# Altium PCB StepTMC5160.PcbDoc (part 1 of 3)
Units mm, origin at the board's own origin, x right, y up, seen from the top; angles counter-clockwise.
Board outline 109.42 x 88.01 mm, 4 copper layers (Component Side, GND, VCC, Bottom Layer), stack 0.778 mm thick; 190 components, 123 nets, 661 pads, 738 vias.
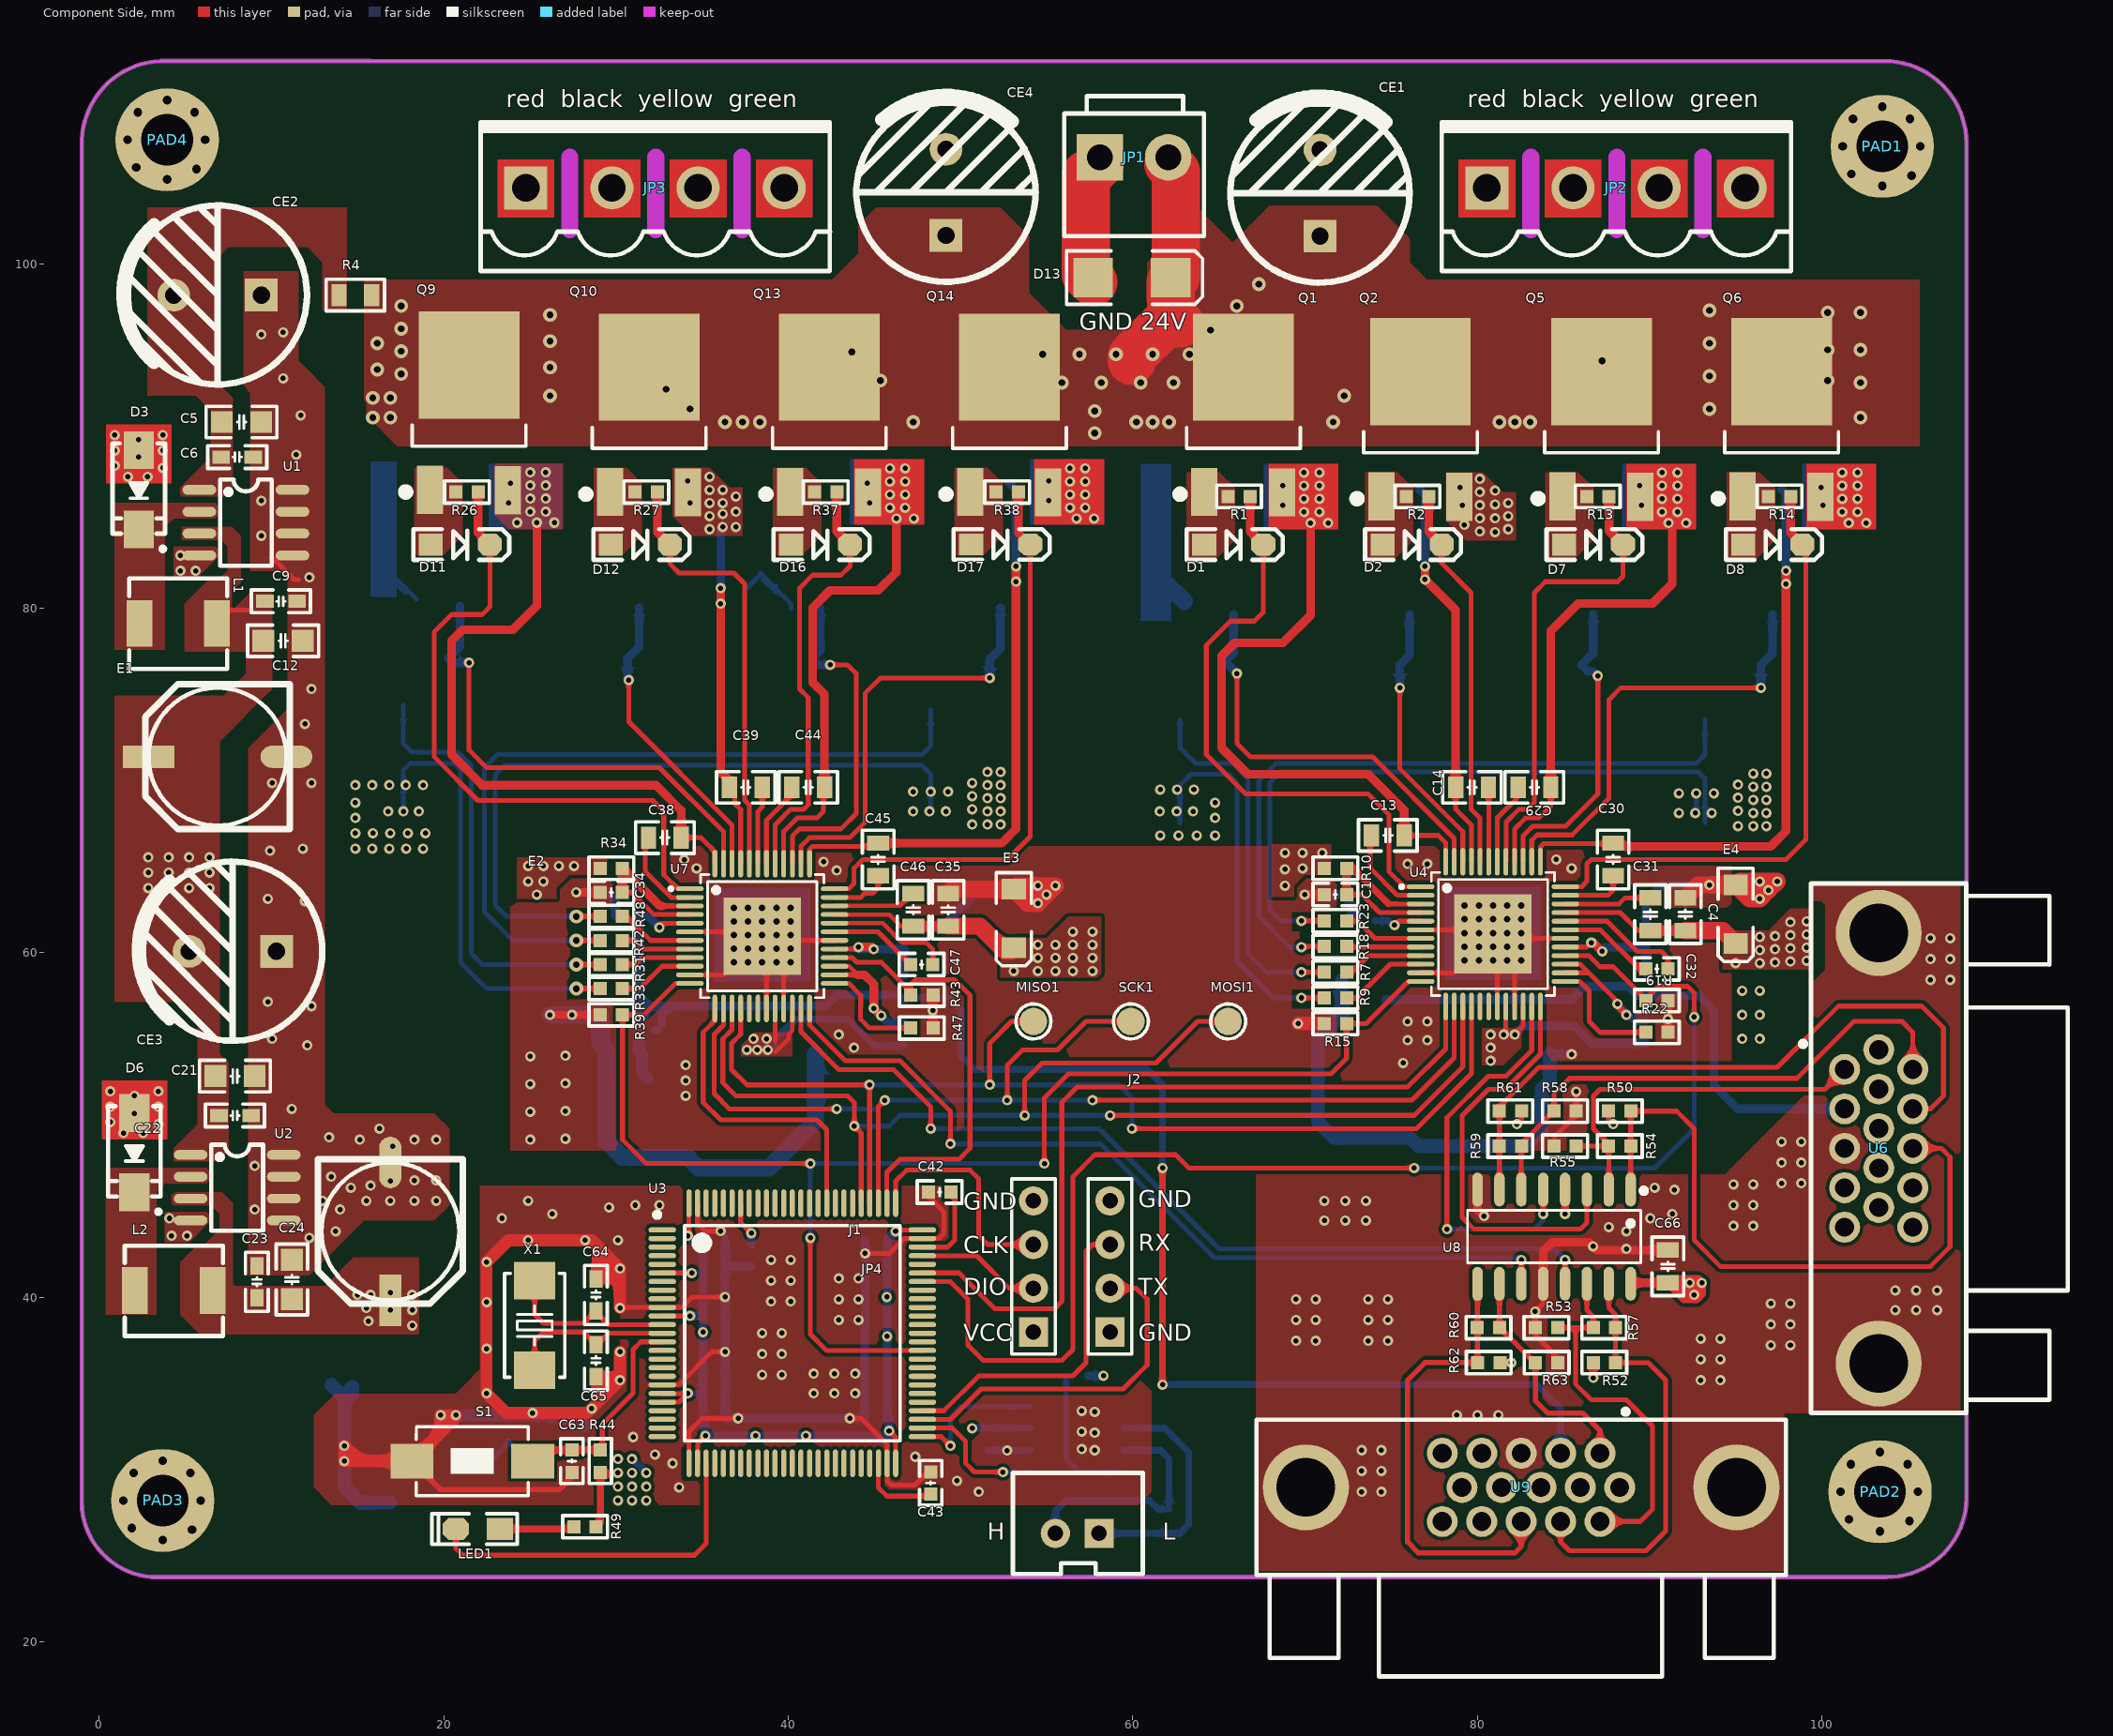
[diagram p0: Component Side view]
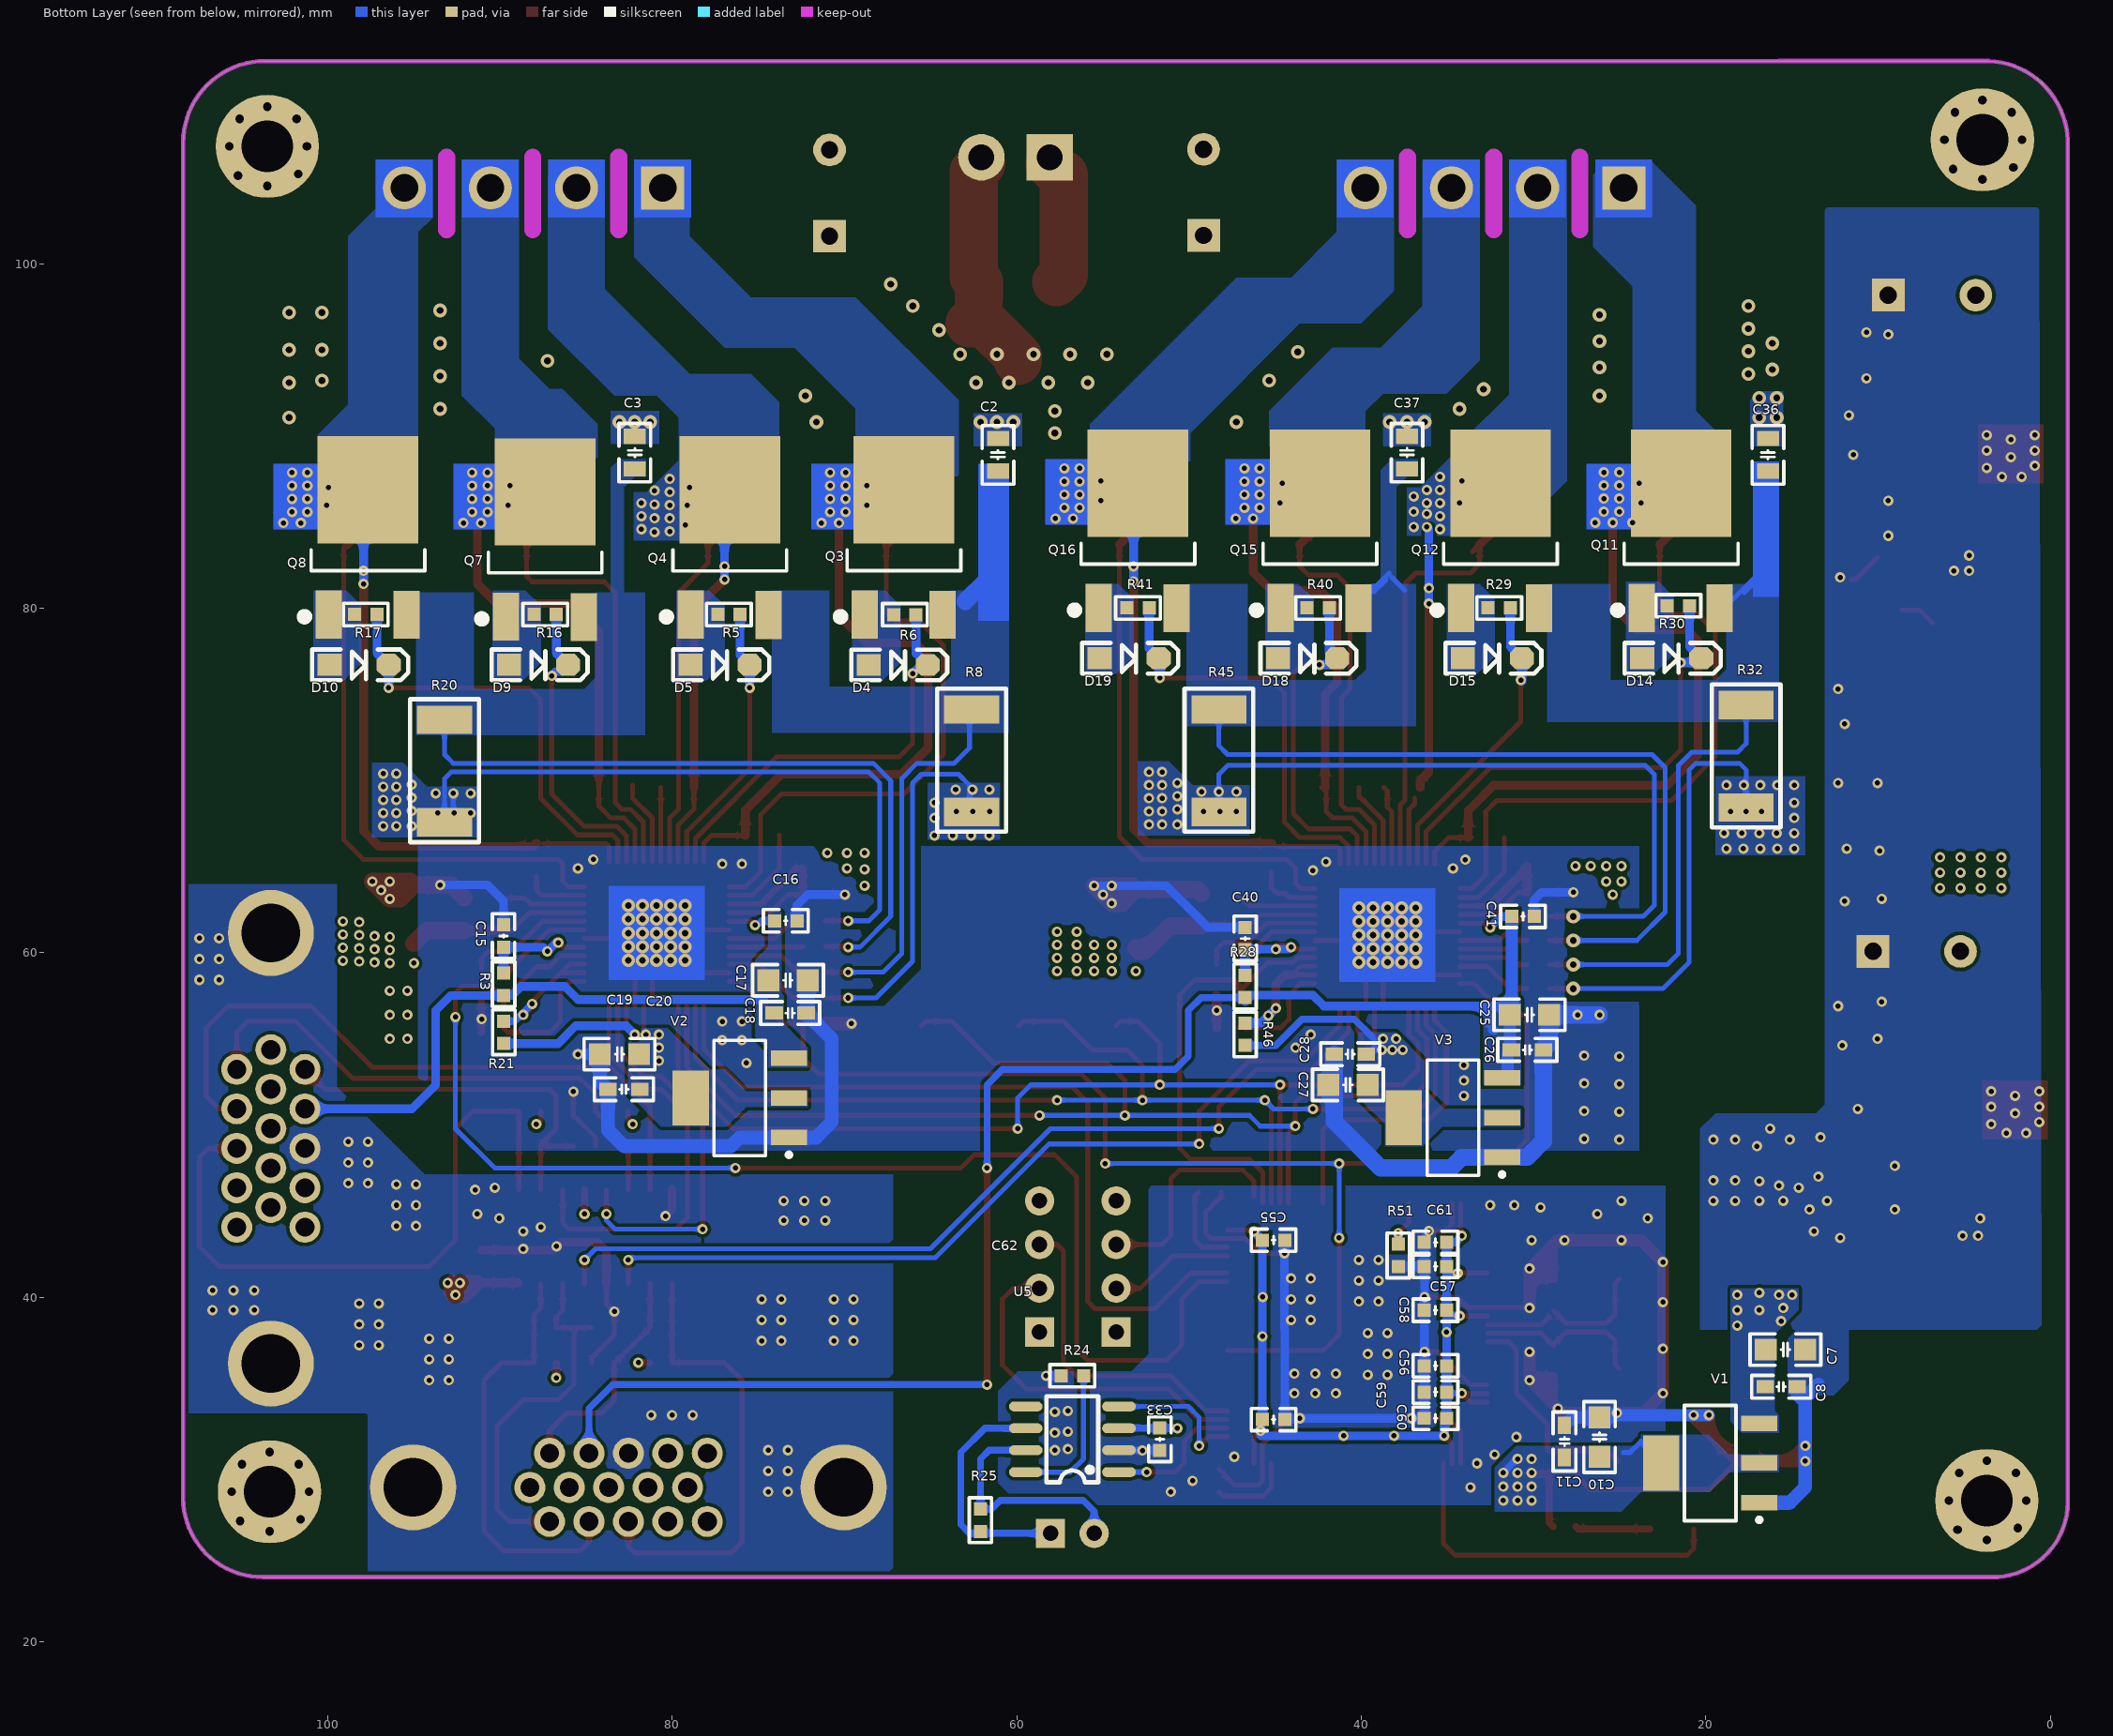
[diagram p1: Bottom Layer view, seen from below]
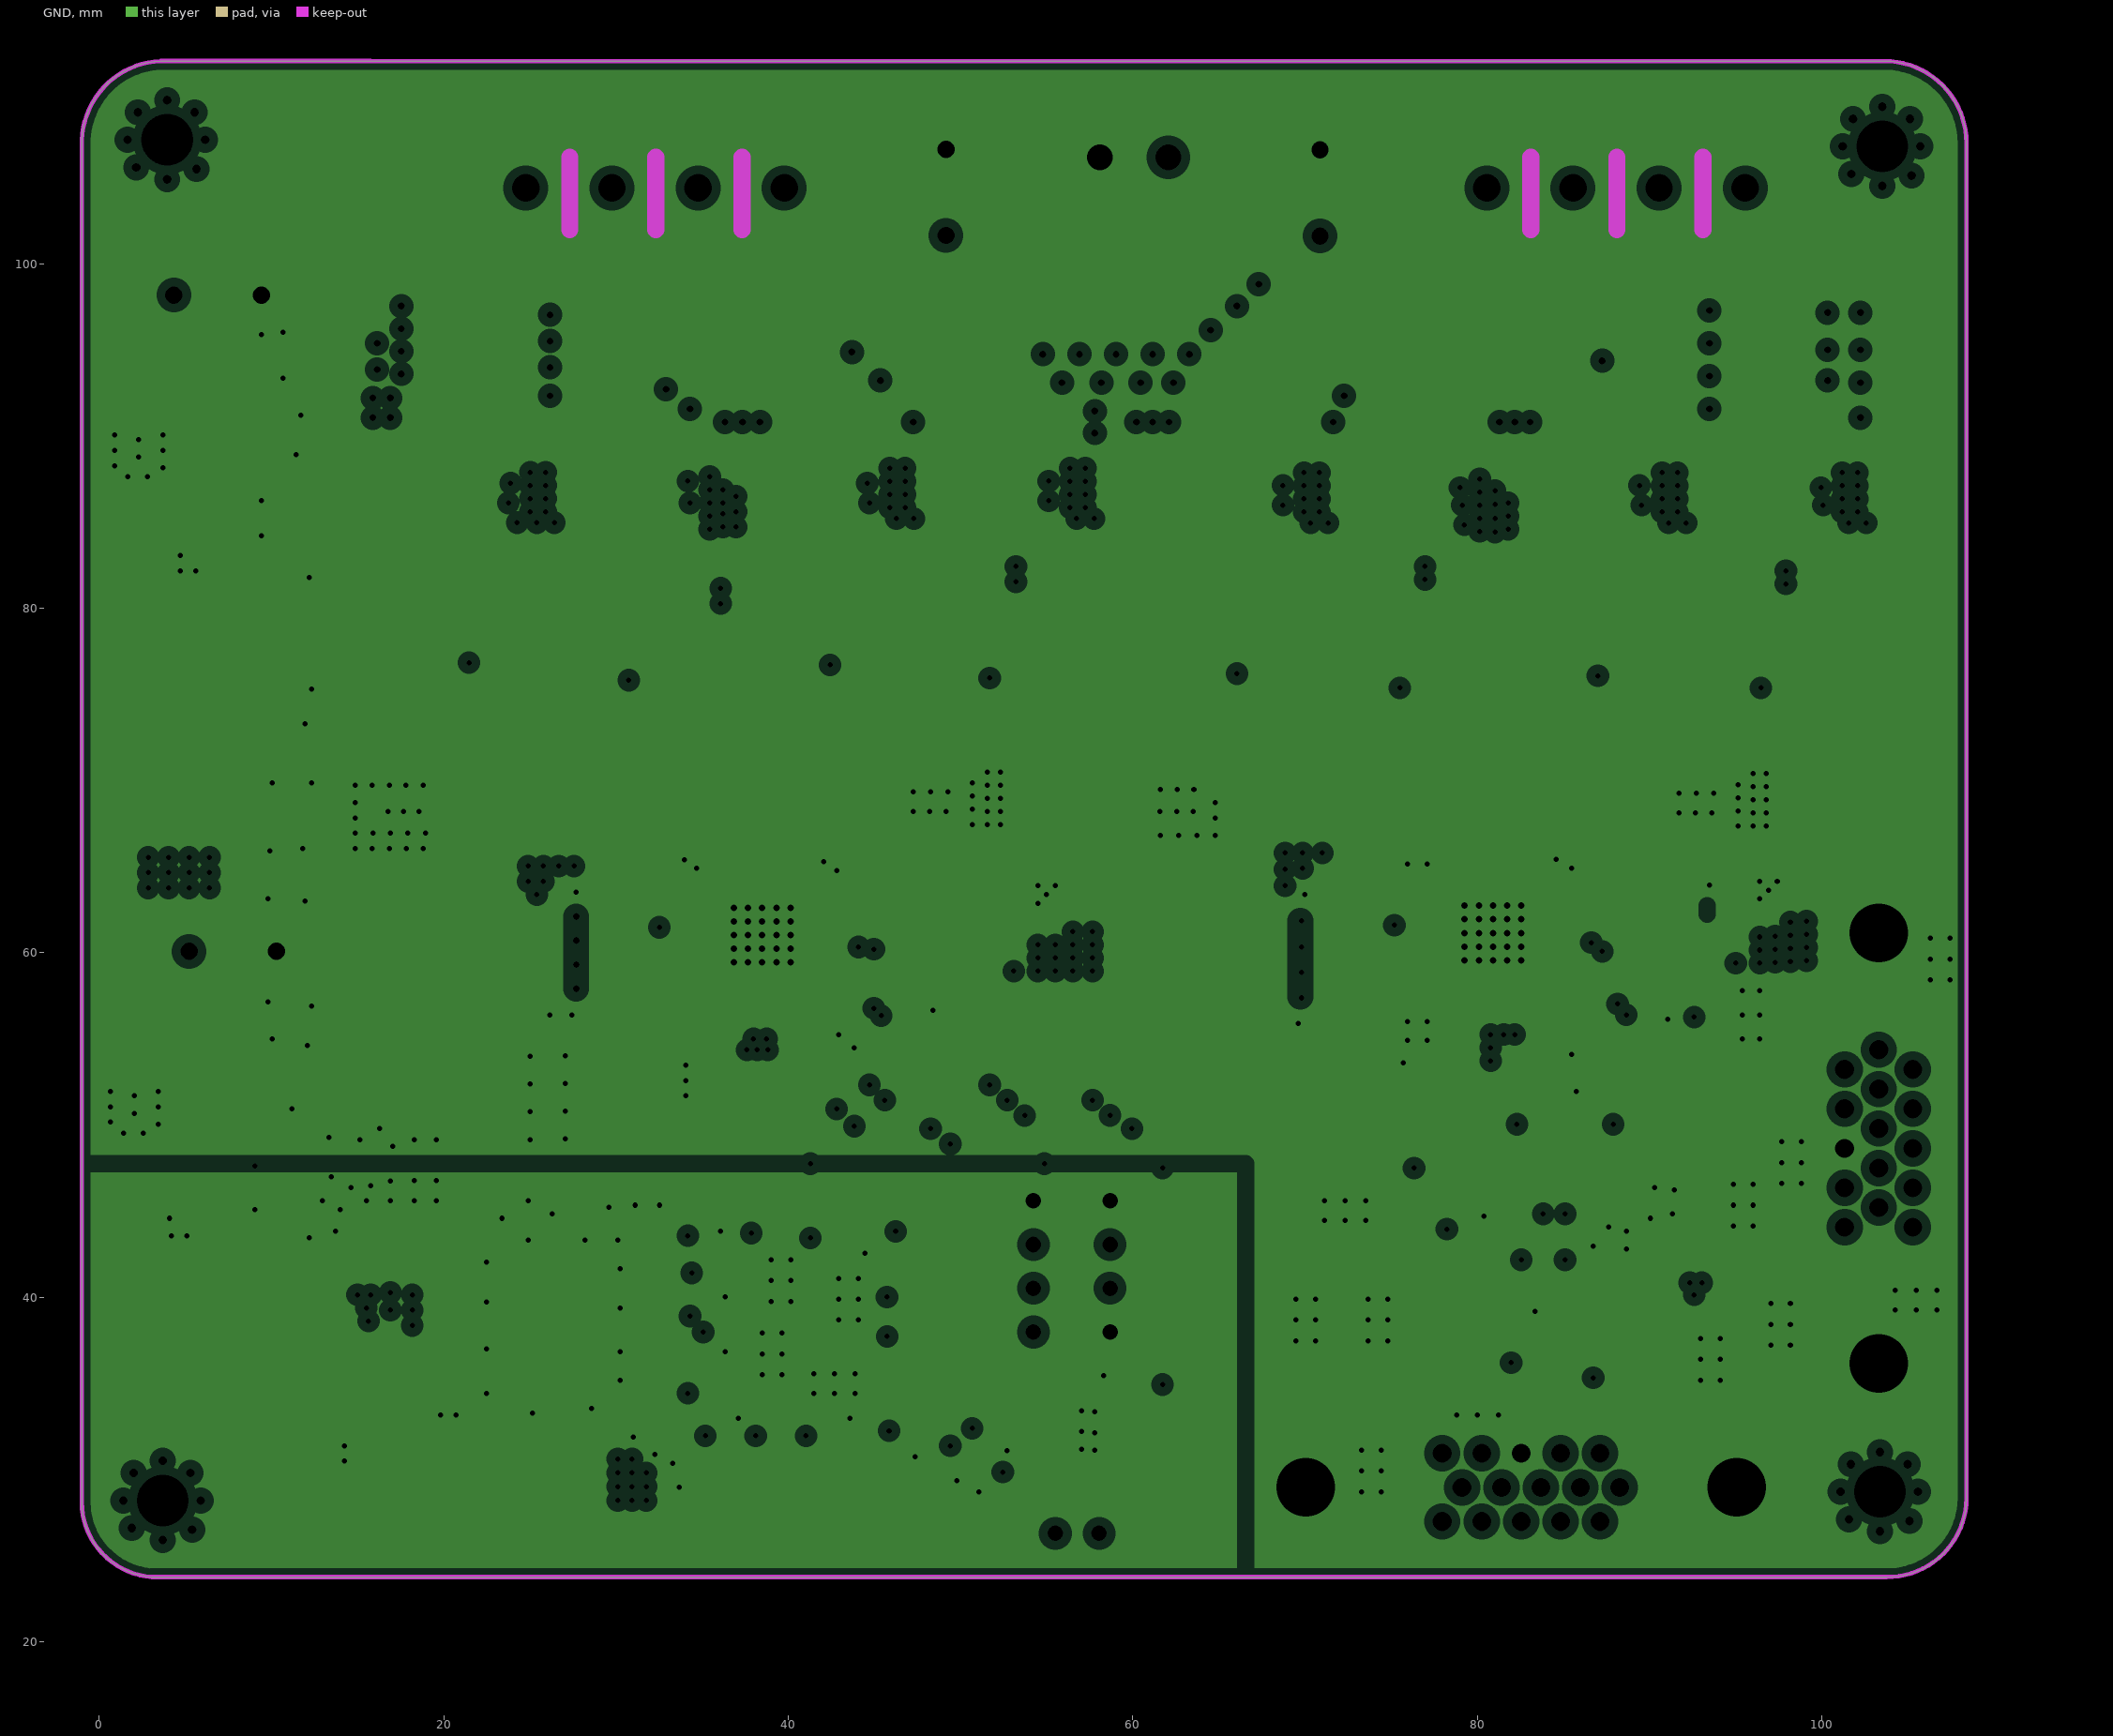
[diagram p2: GND, clearances drawn from the general rule]
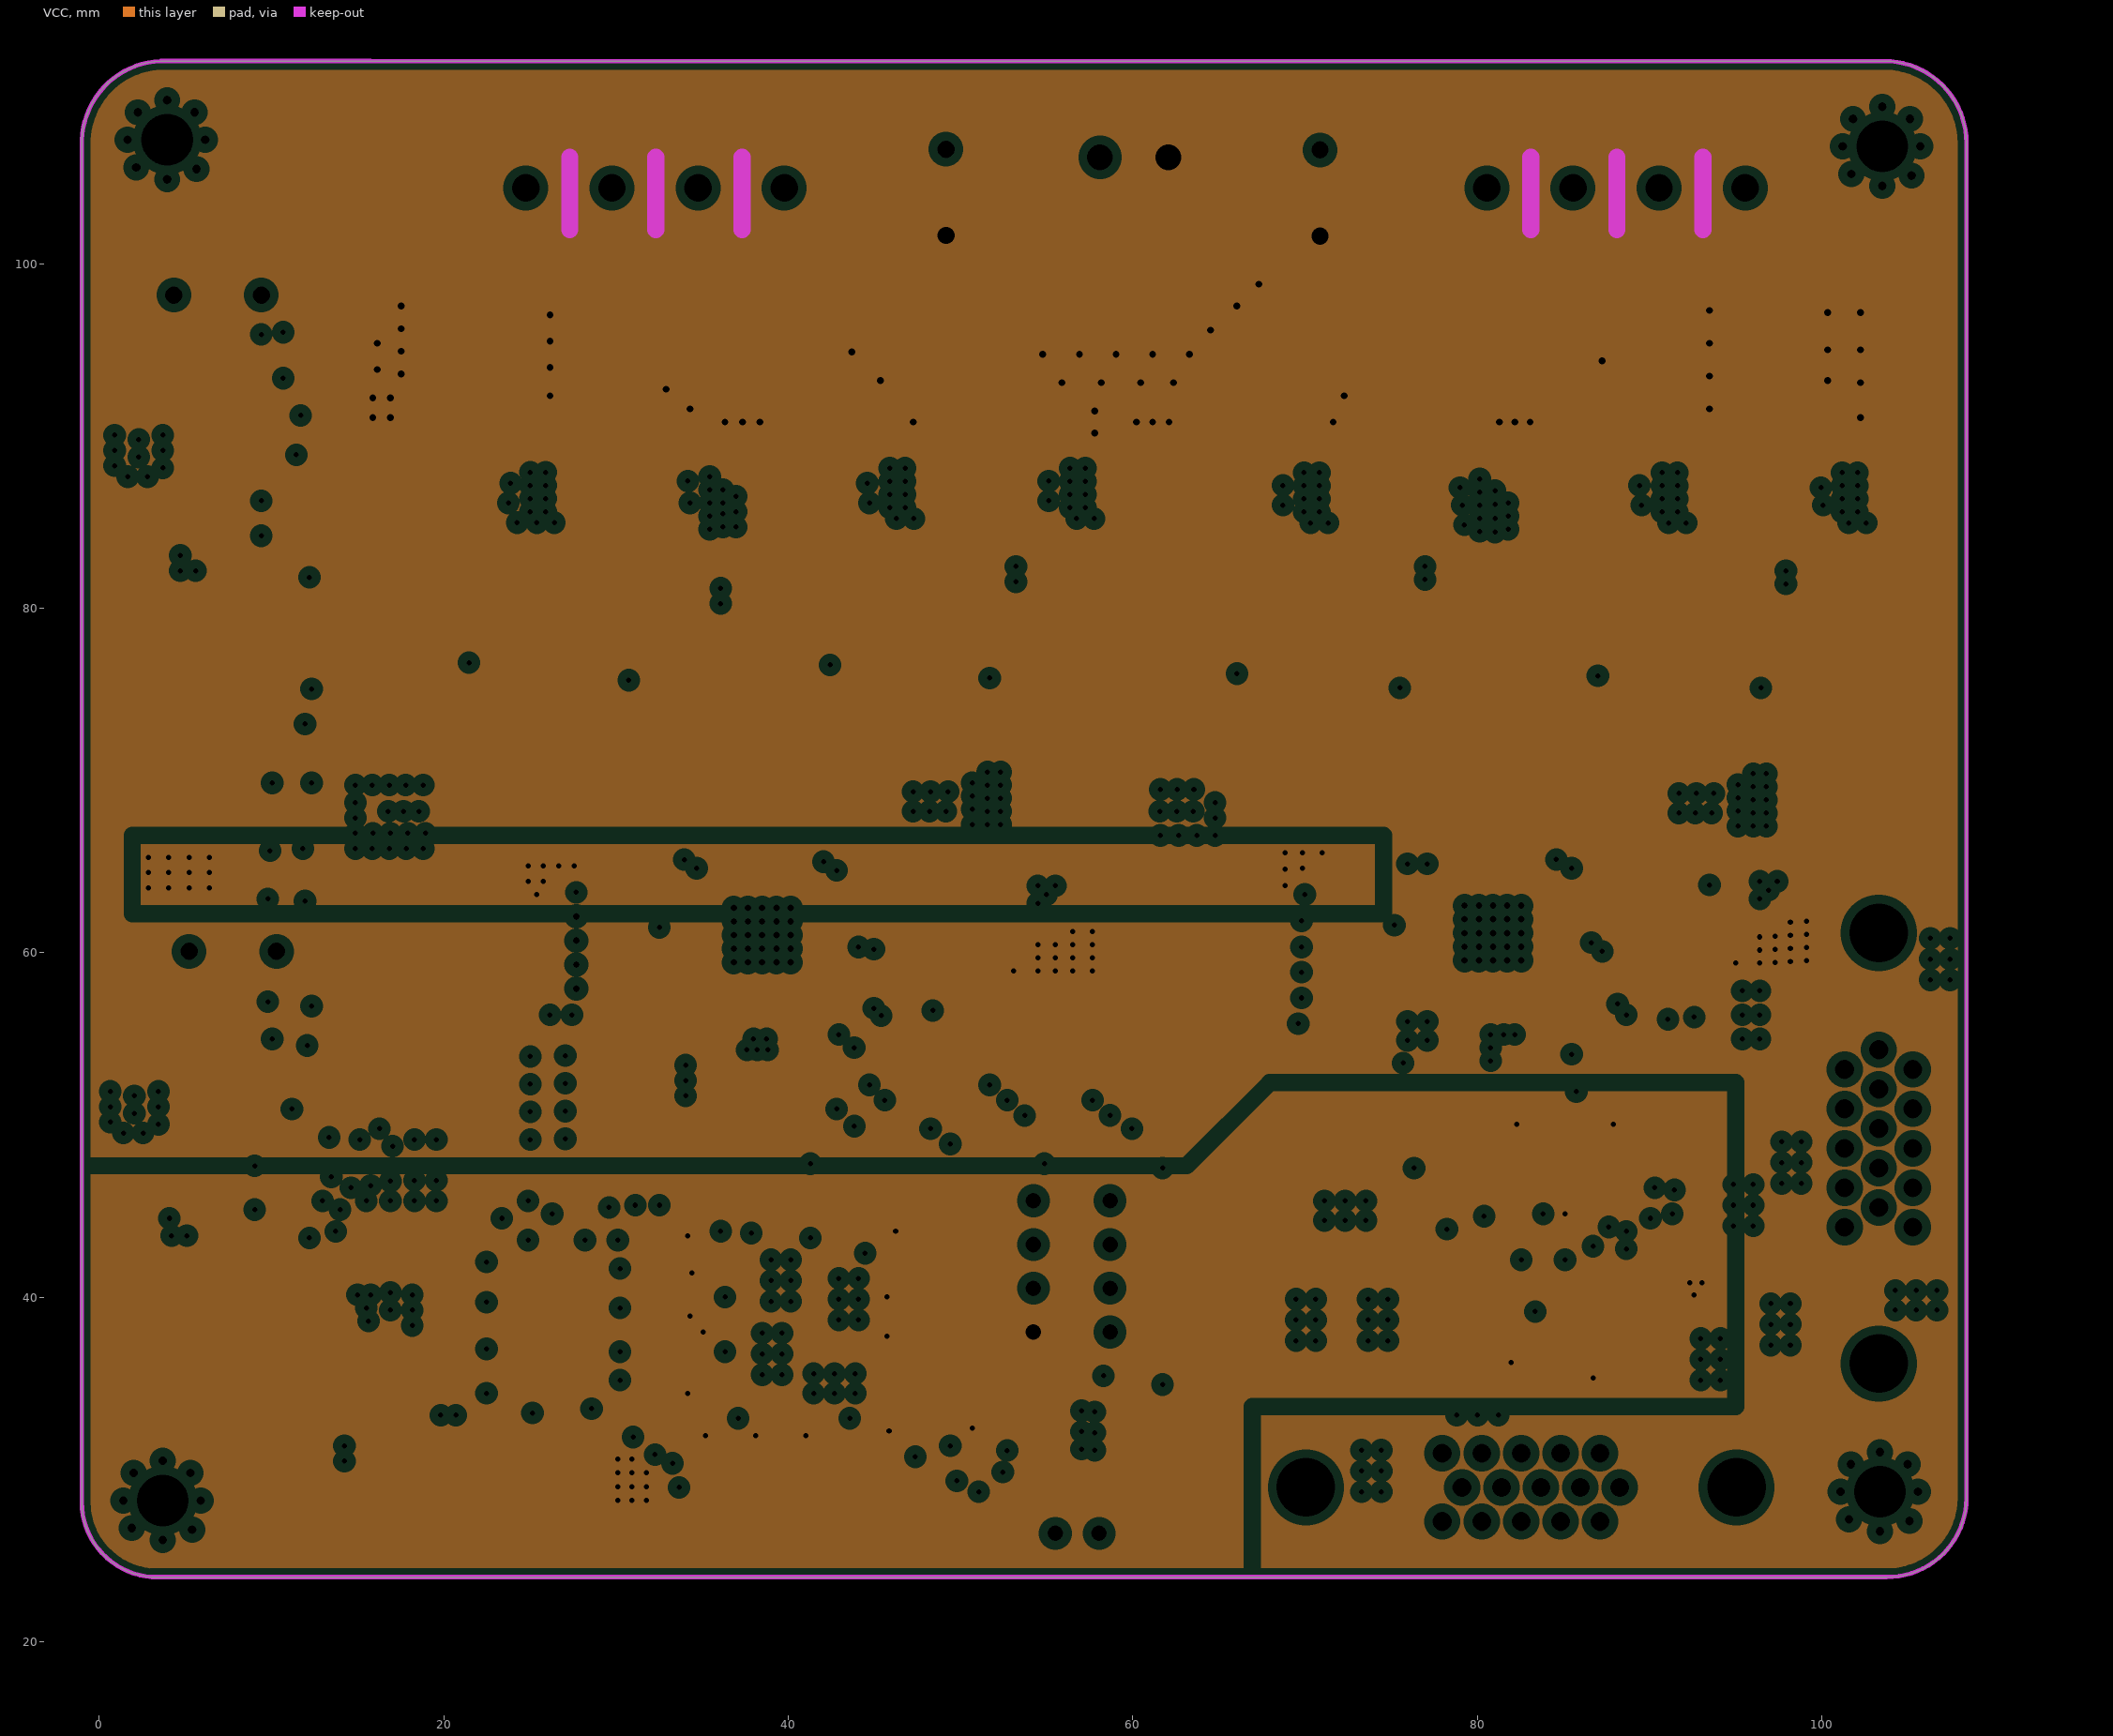
[diagram p3: VCC, clearances drawn from the general rule]

## Layer stack, top to bottom
Top Solder: solder mask 0.0102, Solder Resist, Dk 3.5
Component Side: signal copper 0.0356
Dielectric 1: core 0.254, FR-4, Dk 4.2
GND: plane copper 0.036, net DGND
Dielectric 3: prepreg 0.127, Dk 4.2
VCC: plane copper 0.036, net (Multiple Nets)
Dielectric 4: core 0.254, Dk 4.2
Bottom Layer: signal copper 0.0356
Solder Side: solder mask 0.0102, Solder Resist, Dk 3.5

## Board outline
3.048,23.749 cw(c3.365,28.13) -1.016,28.448 -1.016,106.807 cw(c3.746,106.998) 3.556,111.76 15.748,111.76 103.632,111.76 cw(c103.632,106.999) 108.393,106.999 108.393,28.321 cw(c103.79,28.352) 103.759,23.749

## Design rules (kind name [scope] priority, off if disabled: settings)
Clearance [All] p1: gap=0.2 ignorepadtopadclearanceinfootprint=FALSE except(0: Arc-Hole Track-Hole SMDPad-Hole THPad-Hole Via-Hole Fill-Hole Poly-Hole Region-Hole Text-Hole)
PlaneClearance [All] p1: clearance=0.508
PlaneConnect [All] p1: planeconnectstyle=Direct reliefexpansion=0.508 reliefentries=4 reliefconductorwidth=0.254 reliefairgap=0.254
PolygonConnect [All] p1: connectstyle=Direct reliefconductorwidth=0.254 reliefentries=4 polygonreliefangle="90 Angle" airgapwidth=0.254
RoutingVias [All] p1: holewidth=0.711 width=1.27 viastyle="Through Hole" minholewidth=0.711 minwidth=1.27 maxholewidth=0.711 maxwidth=1.27
SolderMaskExpansion [All] p1: expansion=0.102 istentingtop=FALSE
Width [All] p1: maxlimit=3 minlimit=0.254 preferedwidth=0.279
28 further rules are at their usual default settings.

## Components (designator, comment, footprint, x,y, rotation, side; value= is the part's Value field where it differs from the comment)
C1 "2.2uF/16V" "C 0603_L" 71.755,63.373 r0 top
C2 "104/100V" "C 0805_L" 61.087,88.9 r90 bottom
C3 "104/100V" "C 0805_L" 82.169,89.027 r90 bottom
C4 "104/100V" "C 0805_L" 92.075,62.23 r270 top
C5 "106" "C 0805_M" 8.255,90.805 r180 top
C6 "104" "C 0603_M" 8.001,88.773 r180 top
C7 "106" "C 0805_M" 15.367,36.957 r0 bottom
C8 "104" "C 0603_M" 15.621,34.798 r0 bottom
C9 "104" "C 0603_M" 10.541,80.391 r0 top
C10 "106" "C 0805_M" 26.162,31.877 r270 bottom
C11 "104" "C 0603_M" 28.194,31.623 r270 bottom
C12 "106" "C 0805_M" 10.668,78.105 r0 top
C13 "470nF/50V" "C 0805_L" 74.803,66.802 r180 top
C14 "470nF/50V" "C 0805_L" 79.69,69.596 r0 top
C15 "470nF/50V" "C 0603_L" 89.789,60.96 r270 bottom
C16 "2.2uF/16V" "C 0603_L" 73.406,61.849 r0 bottom
C17 "106" "C 0805_M" 73.279,58.395 r0 bottom
C18 "104" "C 0603_M" 73.152,56.49 r0 bottom
C19 "106" "C 0805_M" 83.058,54.102 r180 bottom
C20 "104" "C 0603_M" 82.804,52.07 r180 bottom
C21 "106" "C 0805_M" 7.874,52.832 r180 top
C22 "104" "C 0603_M" 7.874,50.546 r180 top
C23 "104" "C 0603_M" 9.144,40.894 r90 top
C24 "106" "C 0805_M" 11.176,41.021 r90 top
C25 "106" "C 0805_M" 30.226,56.388 r0 bottom
C26 "104" "C 0603_M" 30.353,54.356 r0 bottom
C27 "106" "C 0805_M" 40.767,52.324 r180 bottom
C28 "104" "C 0603_M" 40.64,54.102 r180 bottom
C29 "470nF/50V" "C 0805_L" 83.312,69.596 r180 top
C30 "470nF/50V" "C 0805_L" 87.884,65.405 r270 top
C31 "104/100V" "C 0805_L" 90.043,62.23 r270 top
C32 "22nF/100V" "C 0603_L" 90.424,59.055 r180 top
C33 "104" "C 0603_L" 51.689,31.75 r90 bottom
C34 "2.2uF/16V" "C 0603_L" 29.718,63.5 r0 top
C35 "104/100V" "C 0805_L" 49.276,62.484 r270 top
C36 "104/100V" "C 0805_L" 16.383,88.9 r90 bottom
C37 "104/100V" "C 0805_L" 37.338,89.027 r90 bottom
C38 "470nF/50V" "C 0805_L" 32.832,66.675 r180 top
C39 "470nF/50V" "C 0805_L" 37.526,69.596 r0 top
C40 "470nF/50V" "C 0603_L" 46.736,60.818 r270 bottom
C41 "2.2uF/16V" "C 0603_L" 30.607,62.103 r0 bottom
C42 "2.2uF/16V" "C 0603_L" 48.783,46.101 r180 top
C43 "2.2uF/16V" "C 0603_L" 48.26,29.21 r90 top
C44 "470nF/50V" "C 0805_L" 41.148,69.596 r180 top
C45 "470nF/50V" "C 0805_L" 45.212,65.405 r270 top
C46 "104/100V" "C 0805_L" 47.244,62.484 r270 top
C47 "22nF/100V" "C 0603_L" 47.737,59.309 r180 top
C55 "104/50V" "C 0603_L" 45.085,43.307 r0 bottom
C56 "104/50V" "C 0603_L" 35.687,36.014 r180 bottom
C57 "104/50V" "C 0603_L" 35.687,41.783 r180 bottom
C58 "104/50V" "C 0603_L" 35.687,39.243 r180 bottom
C59 "104/50V" "C 0603_L" 35.687,34.49 r180 bottom
C60 "104/50V" "C 0603_L" 35.687,32.966 r180 bottom
C61 "104/50V" "C 0603_L" 35.687,43.18 r180 bottom
C62 "104/50V" "C 0603_L" 45.085,32.893 r0 bottom
C63 "104/50V" "C 0603_L" 27.432,30.48 r90 top
C64 "22P/16V" "C 0603_M" 28.829,40.132 r270 top
C65 "22P/16V" "C 0603_M" 28.829,36.322 r90 top
C66 "104/100V" "C 0805_L" 91.059,41.783 r270 top
CE1 "220uF/68V" "CAP 5.0*10*12.5 - BK" 70.866,104.1 r90 top
CE2 "470uF/50V" "CAP 5.0*10*20" 6.858,98.171 r180 top
CE3 "470uF/50V" "CAP 5.0*10*20" 7.747,60.071 r180 top
CE4 "220uF/68V" "CAP 5.0*10*12.5 - BK" 49.149,104.14 r90 top
D1 "1N4148W_C7420318" SOD-123 65.859,83.687 r0 top
D2 "1N4148W_C7420318" SOD-123 76.21,83.687 r0 top
D3 "SS310" SMA 2.286,86.868 r270 top
D4 "1N4148W_C7420318" SOD-123 66.875,76.702 r180 bottom
D5 "1N4148W_C7420318" SOD-123 77.216,76.708 r180 bottom
D6 "SS310" SMA 2.032,48.387 r270 top
D7 "1N4148W_C7420318" SOD-123 86.741,83.687 r0 top
D8 "1N4148W_C7420318" SOD-123 97.155,83.687 r0 top
D9 "1N4148W_C7420318" SOD-123 87.757,76.708 r180 bottom
D10 "1N4148W_C7420318" SOD-123 98.171,76.708 r180 bottom
D11 "1N4148W_C7420318" SOD-123 20.955,83.687 r0 top
D12 "1N4148W_C7420318" SOD-123 31.411,83.687 r0 top
D13 "SMAJ28CA" DIODE-SMB 59.944,99.187 r0 top
D14 "1N4148W_C7420318" SOD-123 21.971,77.089 r180 bottom
D15 "1N4148W_C7420318" SOD-123 32.385,77.089 r180 bottom
D16 "1N4148W_C7420318" SOD-123 41.868,83.687 r0 top
D17 "1N4148W_C7420318" SOD-123 52.324,83.693 r0 top
D18 "1N4148W_C7420318" SOD-123 43.116,77.089 r180 bottom
D19 "1N4148W_C7420318" SOD-123 53.467,77.089 r180 bottom
E1 "180uF/50V" "CM E(8*10.2)" 6.858,71.374 r180 top
E2 "180uF/50V" "CM E(8*10.2)" 16.891,43.815 r270 top locked
E3 "10uF/6.3V" "CD A(3216)" 53.086,61.976 r90 top
E4 "10uF/6.3V" "CD A(3216)" 94.996,62.23 r90 top
J1 "HDR-1X2" XH2.54-LI-2P 56.769,26.289 r180 top
J2 "HDR-1X4" HDR2.54-LI-4P 58.674,41.783 r90 top
JP1 "HDR-1X2" VH3.96-LI-2P 60.071,106.172 r0 top
JP2 "HDR-1X4" KF2EDGK5.0-LI-4P 88.051,104.394 r0 top
JP3 "HDR-1X4" KF2EDGK5.0-LI-4P 32.258,104.394 r0 top
JP4 "HDR-1X4" HDR2.54-LI-4P 54.229,41.783 r90 top
L1 "68uH" IND-SMD_L5.7-W5.2_GSM0530 4.572,79.121 r0 top
L2 "68uH" IND-SMD_L5.7-W5.2_GSM0530 4.318,40.386 r0 top
LED1 "红色" "LED 0805G" 21.971,26.543 r180 top
MISO1 "TEST" "TEST 1.6" 54.229,56.007 r90 top
MOSI1 "TEST" "TEST 1.6" 65.532,56.007 r90 top
PAD1 "PAD" PAD_3.0 103.505,106.807 r0 top
PAD2 "PAD" PAD_3.0 103.378,28.702 r0 top
PAD3 "PAD" PAD_3.0 3.683,28.194 r0 top
PAD4 "PAD" PAD_3.0 3.937,107.188 r0 top
Q1 "AOD4126" TO252 66.421,89.789 r0 top
Q2 "AOD4126" TO252 76.697,89.529 r0 top
Q3 "AOD4126" TO252 66.548,82.677 r180 bottom
Q4 "AOD4126" TO252 76.654,82.671 r180 bottom
Q5 "AOD4126" TO252 87.207,89.535 r0 top
Q6 "AOD4126" TO252 97.663,89.535 r0 top
Q7 "AOD4126" TO252 87.376,82.55 r180 bottom
Q8 "AOD4126" TO252 97.663,82.677 r180 bottom
Q9 "AOD4126" TO252 21.463,89.916 r0 top
Q10 "AOD4126" TO252 31.919,89.789 r0 top
Q11 "AOD4126" TO252 21.428,83.058 r180 bottom
Q12 "AOD4126" TO252 31.912,83.058 r180 bottom
Q13 "AOD4126" TO252 42.376,89.789 r0 top
Q14 "AOD4126" TO252 52.832,89.789 r0 top
Q15 "AOD4126" TO252 42.395,83.058 r180 bottom
Q16 "AOD4126" TO252 52.959,83.058 r180 bottom
R1 "10R 1%" "R 0603_L" 66.167,86.487 r180 top
R2 "10R 1%" "R 0603_L" 76.527,86.481 r180 top
R3 "2R2 1%" "R 0603_L" 89.789,58.166 r90 bottom
R4 "0R/NC" "R 0805_L" 14.859,98.171 r0 top
R5 "10R 1%" "R 0603_L" 76.708,79.629 r0 bottom
R6 "10R 1%" "R 0603_L" 66.494,79.623 r0 bottom
R7 "47R 1%" "R 0603_L" 71.755,58.864 r180 top
R8 "50mR/3W" "R 2512_L" 62.611,71.12 r90 bottom
R9 "47R 1%" "R 0603_L" 71.755,57.372 r180 top
R10 "0R/NC" "R 0603_L" 71.755,64.897 r180 top
R13 "10R 1%" "R 0603_L" 86.995,86.487 r180 top
R14 "10R 1%" "R 0603_L" 97.536,86.487 r180 top
R15 "0R/NC" "R 0603_L" 71.755,55.88 r180 top
R16 "10R 1%" "R 0603_L" 87.376,79.629 r0 bottom
R17 "10R 1%" "R 0603_L" 97.79,79.629 r0 bottom
R18 "47R 1%" "R 0603_L" 71.755,60.357 r180 top
R19 "4.7K" "R 0603_L" 90.424,57.214 r0 top
R20 "50mR/3W" "R 2512_L" 93.218,70.514 r90 bottom
R21 "4.7K" "R 0603_L" 89.774,55.372 r270 bottom
R22 "4.7K" "R 0603_L" 90.424,55.372 r0 top
R23 "47R 1%" "R 0603_L" 71.755,61.849 r180 top
R24 "10K" "R 0603_L" 56.769,35.433 r0 bottom
R25 "120R" "R 0603_L" 62.103,27.051 r90 bottom
R26 "10R 1%" "R 0603_L" 21.336,86.741 r180 top
R27 "10R 1%" "R 0603_L" 31.75,86.741 r180 top
R28 "2R2 1%" "R 0603_L" 46.736,58.039 r90 bottom
R29 "10R 1%" "R 0603_L" 31.989,80.01 r0 bottom
R30 "10R 1%" "R 0603_L" 21.59,80.137 r0 bottom
R31 "47R 1%" "R 0603_L" 29.718,59.309 r180 top
R32 "50mR/3W" "R 2512_L" 17.653,71.374 r90 bottom
R33 "47R 1%" "R 0603_L" 29.718,57.912 r180 top
R34 "0R/NC" "R 0603_L" 29.718,64.897 r180 top
R37 "10R 1%" "R 0603_L" 42.164,86.741 r180 top
R38 "10R 1%" "R 0603_L" 52.705,86.741 r180 top
R39 "0R/NC" "R 0603_L" 29.718,56.388 r180 top
R40 "10R 1%" "R 0603_L" 42.503,80.01 r0 bottom
R41 "10R 1%" "R 0603_L" 52.959,80.01 r0 bottom
R42 "47R 1%" "R 0603_L" 29.718,60.706 r180 top
R43 "4.7K" "R 0603_L" 47.752,57.531 r0 top
R44 "4.7K" "R 0603_L" 29.083,30.48 r270 top
R45 "50mR/3W" "R 2512_L" 48.26,71.12 r90 bottom
R46 "4.7K" "R 0603_L" 46.736,55.26 r270 bottom
R47 "4.7K" "R 0603_L" 47.752,55.626 r0 top
R48 "47R 1%" "R 0603_L" 29.718,62.103 r180 top
R49 "3K" "R 0603_L" 28.194,26.67 r0 top
R50 "1K" "R 0603_L" 88.265,50.8 r180 top
R51 "4.7K" "R 0603_L" 37.846,42.418 r90 bottom
R52 "1K" "R 0603_L" 87.376,36.195 r180 top
R53 "1K" "R 0603_L" 84.01,38.227 r0 top
R54 "120R" "R 0603_L" 88.265,48.768 r180 top
R55 "1K" "R 0603_L" 85.09,48.768 r0 top
R57 "120R" "R 0603_L" 87.376,38.227 r0 top
R58 "1K" "R 0603_L" 85.09,50.8 r180 top
R59 "120R" "R 0603_L" 81.915,48.768 r0 top
R60 "120R" "R 0603_L" 80.645,38.227 r0 top
R61 "1K" "R 0603_L" 81.915,50.8 r0 top
R62 "1K" "R 0603_L" 80.66,36.195 r0 top
R63 "1K" "R 0603_L" 84.018,36.195 r180 top
S1 "SW-PB" SW_PB2_A1 21.59,30.48 r270 top
SCK1 "TEST" "TEST 1.6" 59.88,56.007 r90 top
U1 "XL1509-12E1" SOIC-8_L5.0-W4.0-P1.27-LS6.0-BL 8.509,84.963 r270 top
U2 "XL1509-5.0E1" SOIC-8_L5.0-W4.0-P1.27-LS6.0-BL 8.001,46.355 r270 top
U3 "stm32h750vbt6" LQFP-100_L14.0-W14.0-P0.50-LS16.0-BL 40.228,37.903 r270 top
U4 "TMC5160A-TA-T" TQFP-48_L7.0-W7.0-P0.50-LS9.0-BL-EP#1 80.907,61.077 r270 top locked
U5 "SN65HVD230QDR" SOIC-8_L5.0-W4.0-P1.27-LS6.0-BL 56.769,31.75 r90 bottom
U6 "XDDB-1518-0932" DDSUB-TH_HYC06-HDR15B-060 103.302,48.644 r90 top
U7 "TMC5160A-TA-T" TQFP-48_L7.0-W7.0-P0.50-LS9.0-BL-EP#2 38.481,60.96 r270 top locked
U8 "AM26LV32EIDR" SOIC-16_L9.9-W3.9-P1.27-LS6.0-BL 84.455,43.511 r180 top
U9 "XDDB-1518-0932" DDSUB-TH_HYC06-HDR15B-060 82.542,28.956 r0 top
V1 "AMS1117-3V3" SOT223_L 19.741,30.367 r0 bottom
V2 "AMS1117-3V3" SOT223_L 76.073,51.562 r0 bottom
V3 "AMS1117-3V3" SOT223_L 34.671,50.419 r0 bottom
X1 "8MHz" "OSC 6035-2P" 25.273,38.354 r90 top

## Footprints (in the part's own frame and the unit in brackets; to place one, negate y for a bottom-side part, rotate by r counter-clockwise, add the part's x,y. Pads: shape width x height; smd on the part's side, far side on the other; paste and mask are expansions set on the pad)
"C 0603_L" [mil] "无极性贴片电容                                       淘宝ID:黄晶宝石"
  rect 30x30 smd: 1(-25.59,0) 2(25.59,0)
  silkscreen extent -51,-26 51,26, body extent -31,-16 31,16, height 32
"C 0603_M" [mil] "无极性贴片电容                                淘宝ID:黄晶宝石"
  rect 40x30 smd: 1(-36.5,0) 2(36.5,0)
  silkscreen extent -68,-26 68,26, body extent -31,-16 31,16, height 32
"C 0805_L" [mil] "无极性贴片电容                                        淘宝ID:黄晶宝石"
  rect 35x50 smd: 1(-37.4,0) 2(37.4,0)
  silkscreen extent -67,-36 67,36, body extent -39,-24 39,24, height 20
"C 0805_M" [mil] "无极性贴片电容                                         淘宝ID:黄晶宝石"
  rect 50x50 smd: 1(-45,0) 2(45,0)
  silkscreen extent -81,-36 81,36, body extent -39,-24 39,24, height 20
"CAP 5.0*10*12.5 - BK" [mm] "脚距5mm直径10mm高度12.5mm"
  rect 1.9x1.9 hole 1: 1(-2.5,0)
  round 1.9 hole 1: 2(2.5,0)
  silkscreen extent -5.2,-5.21 5.64,5.2, body extent -5,-5 5.01,5, height 12.54
"CAP 5.0*10*20" [mm] "脚距5mm直径10mm高度20mm"
  rect 1.9x1.9 hole 1: 1(-2.54,0)
  round 1.9 hole 1: 2(2.54,0)
  silkscreen extent -5.19,-5.21 5.5,5.19, body extent -5,-5 5.01,5, height 20.03
"CD A(3216)" [mm] "长3.2mm，宽1.6mm，厚1.6mm      淘宝ID:黄晶宝石"
  rect 1.2x1.4 smd: 1(-1.7,0) 2(1.7,0)
  silkscreen extent -2.74,-1.02 2.67,1.02, body extent -1.6,-0.8 1.6,0.8, height 1.6
"CM E(8*10.2)" [mm] "贴片电解电容，直径8mm，高10.2mm        淘宝ID:黄晶宝石"
  rect 3x1.3 smd: 1(4,0)
  oval 3x1.3 smd: 2(-4,0)
  silkscreen extent -4.2,-4.2 4.2,4.2, body extent -4.5,-4.15 4.5,4.15, height 10.2
DDSUB-TH_HYC06-HDR15B-060 [mil]
  round 70.9 hole 43.3: 1(180.3,78) 2(90.1,78) 3(-0.1,78) 4(-90.2,78) 5(-180.4,78) 6(225.3,0) 7(135.2,0) 8(45,0) 9(-45.1,0) 10(-135.3,0) 11(180.3,-78) 12(90.1,-78) 13(-0.1,-78) 14(-90.2,-78) 15(-180.4,-78)
  round 177.2 hole 133.9 mask+4: 16(-492.1,0) 17(492.1,0)
  round 196.8 hole 128: 16(-492.1,0) 17(492.1,0)
  silkscreen extent -605,-432 605,179
DIODE-SMB [mm] "DO-214-AA/SMB; 2 C-Bend Leads; Body 5.3 x 3.6 mm, inc. leads (LxW)"
  rect 2.3x2.3 smd: 1(-2.25,0) 2(2.25,0)
  silkscreen extent -3.8,-1.55 4.1,1.55
HDR2.54-LI-4P [mm] "排针，4脚"
  rect 1.7x1.7 hole 0.9: 1(-3.81,0)
  round 1.7 hole 0.9: 2(-1.27,0) 3(1.27,0) 4(3.81,0)
  silkscreen extent -5.08,-1.27 5.08,1.27, body extent -5.08,-1.27 5.08,1.27, height 8.5
IND-SMD_L5.7-W5.2_GSM0530 [mm]
  rect 1.501x2.7 smd: 1(-2.25,0) 2(2.25,0)
  silkscreen extent -2.87,-2.64 2.85,2.6
KF2EDGK5.0-LI-4P [mm] "立插端子"
  rect 2.5x2.5 hole 1.6: 1(-7.5,0)
  round 2.5 hole 1.6: 2(-2.5,0) 3(2.5,0) 4(7.5,0)
  silkscreen extent -10.12,-4.83 10.17,3.81, body extent -10.04,-4.75 10.04,3.75, height 11.25
"LED 0805G" [mil] "绿色0805LED                              淘宝ID:黄晶宝石"
  rect 60x50 smd: 1(-50,0)
  oct 60x50 smd: 2(50,0)
  silkscreen extent -90,-35 105,35, body extent -39,-25 39,25, height 32
LQFP-100_L14.0-W14.0-P0.50-LS16.0-BL [mm]
  oval 0.3x1.6 smd: 1(-6,-7.55) 2(-5.5,-7.55) 3(-5,-7.55) 4(-4.5,-7.55) 5(-4,-7.55) 6(-3.5,-7.55) 7(-3,-7.55) 8(-2.5,-7.55) 9(-2,-7.55) 10(-1.5,-7.55) 11(-1,-7.55) 12(-0.5,-7.55) 13(0,-7.55) 14(0.5,-7.55) 15(1,-7.55) 16(1.5,-7.55) 17(2,-7.55) 18(2.5,-7.55) 19(3,-7.55) 20(3.5,-7.55) 21(4,-7.55) 22(4.5,-7.55) 23(5,-7.55) 24(5.5,-7.55) 25(6,-7.55) 51(6,7.55) 52(5.5,7.55) 53(5,7.55) 54(4.5,7.55) 55(4,7.55) 56(3.5,7.55) 57(3,7.55) 58(2.5,7.55) 59(2,7.55) 60(1.5,7.55) 61(1,7.55) 62(0.5,7.55) 63(0,7.55) 64(-0.5,7.55) 65(-1,7.55) 66(-1.5,7.55) 67(-2,7.55) 68(-2.5,7.55) 69(-3,7.55) 70(-3.5,7.55) 71(-4,7.55) 72(-4.5,7.55) 73(-5,7.55) 74(-5.5,7.55) 75(-6,7.55)
  oval 1.6x0.3 smd: 26(7.55,-6) 27(7.55,-5.5) 28(7.55,-5) 29(7.55,-4.5) 30(7.55,-4) 31(7.55,-3.5) 32(7.55,-3) 33(7.55,-2.5) 34(7.55,-2) 35(7.55,-1.5) 36(7.55,-1) 37(7.55,-0.5) 38(7.55,0) 39(7.55,0.5) 40(7.55,1) 41(7.55,1.5) 42(7.55,2) 43(7.55,2.5) 44(7.55,3) 45(7.55,3.5) 46(7.55,4) 47(7.55,4.5) 48(7.55,5) 49(7.55,5.5) 50(7.55,6) 76(-7.55,6) 77(-7.55,5.5) 78(-7.55,5) 79(-7.55,4.5) 80(-7.55,4) 81(-7.55,3.5) 82(-7.55,3) 83(-7.55,2.5) 84(-7.55,2) 85(-7.55,1.5) 86(-7.55,1) 87(-7.55,0.5) 88(-7.55,0) 89(-7.55,-0.5) 90(-7.55,-1) 91(-7.55,-1.5) 92(-7.55,-2) 93(-7.55,-2.5) 94(-7.55,-3) 95(-7.55,-3.5) 96(-7.55,-4) 97(-7.55,-4.5) 98(-7.55,-5) 99(-7.55,-5.5) 100(-7.55,-6)
  silkscreen extent -7.03,-8 6.25,6.25
"OSC 6035-2P" [mm] "6mm*3.5mm*1mm(长*宽*高)"
  rect 2.2x2.4 smd: 1(-2.6,0) 2(2.6,0)
  silkscreen extent -3,-1.75 3.02,1.75, body extent -3,-1.75 3,1.75, height 1.06
PAD_3.0 [mm]
  round 6 hole 3: ""(0,0)
"R 0603_L" [mil] "1/10W贴片电阻                 淘宝ID:黄晶宝石"
  rect 30x30 smd: 1(-25.59,0) 2(25.59,0)
  silkscreen extent -51,-26 51,26, body extent -31,-16 32,16, height 16
"R 0805_L" [mil] "1/8W贴片电阻"
  rect 35x50 smd: 1(-37.4,0) 2(37.4,0)
  silkscreen extent -67,-36 67,36, body extent -39,-25 39,25, height 20
"R 2512_L" [mm] "1W贴片电阻"
  rect 1.65x3.2 smd: 1(-2.95,0) 2(3,0)
  silkscreen extent -4.1,-2 4.2,2, body extent -3.2,-1.6 3.2,1.6, height 0.55
SMA [mm] "4.5x2.6*2.2mm（长宽高，不包括引脚）"
  rect 2.2x1.75 smd: 1(-2.3,0) 2(2.3,0)
  silkscreen extent -2.7,-1.52 3.56,1.52, body extent -2.53,-1.3 2.58,1.3, height 2.15
SOD-123 [mil] "2.7x1.6X1.1mm（长宽高，不包括引脚） 淘宝ID:黄晶宝石"
  rect 55x50 smd: 1(-67.5,0)
  oct 55x50 smd: 2(67.5,0)
  silkscreen extent -108,-35 112,35, body extent -73,-31 73,31, height 48
SOIC-8_L5.0-W4.0-P1.27-LS6.0-BL [mil]
  oval 22.4x76.8 smd: 1(-75,-106.5) 2(-25,-106.5) 3(25,-106.5) 4(75,-106.5) 5(75,106.5) 6(25,106.5) 7(-25,106.5) 8(-75,106.5)
  silkscreen extent -98,-59 99,59
SOIC-16_L9.9-W3.9-P1.27-LS6.0-BL [mm]
  oval 0.602x1.971 smd: 1(-4.445,-2.736) 2(-3.175,-2.736) 3(-1.905,-2.736) 4(-0.635,-2.736) 5(0.635,-2.736) 6(1.905,-2.736) 7(3.175,-2.736) 8(4.445,-2.736) 9(4.445,2.736) 10(3.175,2.736) 11(1.905,2.736) 12(0.635,2.736) 13(-0.635,2.736) 14(-1.905,2.736) 15(-3.175,2.736) 16(-4.445,2.736)
  silkscreen extent -5.36,-2.82 5.03,1.52
SOT223_L [mm] "SOT223, 4-Leads, Body 6.5x3.5mm, Pitch 2.3mm, Lead Span 7mm, IPC High Density"
  rect 2.1x0.9 smd: 1(-2.85,2.3) 2(-2.85,0) 3(-2.85,-2.3)
  rect 2.1x3.2 smd: 4(2.85,0)
  silkscreen extent -2.97,-3.35 1.5,3.42, body extent -1.85,-3.35 1.85,3.35, height 1.7
SW_PB2_A1 [mm]
  rect 2x2.5 smd: 1(0,3.556) 2(0,-3.444)
  silkscreen extent -2,-3.19 2,3.31, body extent -1.93,-3.94 1.92,3.95, height 2.5
"TEST 1.6" [mm] "测试点1.6mm"
  round 1.6 smd paste-1.6: 1(0,0)
  silkscreen extent -1.02,-1.02 1.02,1.01
TO252 [mil] "252晶体管"
  rect 60x110 smd: 1(-89.55,-119.77) 3(88.45,-120.77)
  rect 230x245 smd: 2(0,165.35)
  silkscreen extent -153,-133 130,28, body extent -128,-120 128,251, height 91
TQFP-48_L7.0-W7.0-P0.50-LS9.0-BL-EP#1 [mil]
  oval 11x63 smd paste-3937 mask+2: 1(-108.2,-165.3) 2(-88.5,-165.3) 3(-68.9,-165.3) 4(-49.2,-165.3) 5(-29.5,-165.3) 6(-9.8,-165.3) 7(9.9,-165.3) 8(29.6,-165.3) 9(49.3,-165.3) 10(68.9,-165.3) 11(88.6,-165.3) 12(108.3,-165.3) 25(108.3,165.3) 26(88.6,165.3) 27(68.9,165.3) 28(49.3,165.3) 29(29.6,165.3) 30(9.9,165.3) 31(-9.8,165.3) 32(-29.5,165.3) 33(-49.2,165.3) 34(-68.9,165.3) 35(-88.5,165.3) 36(-108.2,165.3)
  oval 63x11 smd paste-3937 mask+2: 13(165.4,-108.3) 14(165.4,-88.6) 15(165.4,-68.9) 16(165.4,-49.2) 17(165.4,-29.5) 18(165.4,-9.8) 19(165.4,9.8) 20(165.4,29.5) 21(165.4,49.2) 22(165.4,68.9) 23(165.4,88.6) 24(165.4,108.3) 37(-165.3,108.3) 38(-165.3,88.6) 39(-165.3,68.9) 40(-165.3,49.2) 41(-165.3,29.5) 42(-165.3,9.8) 43(-165.3,-9.8) 44(-165.3,-29.5) 45(-165.3,-49.2) 46(-165.3,-68.9) 47(-165.3,-88.6) 48(-165.3,-108.3)
  rect 181.1x177.17 smd paste-3937 mask+2: 49(0,0)
  silkscreen extent -141,-213 141,141
TQFP-48_L7.0-W7.0-P0.50-LS9.0-BL-EP#2 [mil]
  oval 11x63 smd paste-3937 mask+2: 1(-108.2,-165.3) 2(-88.5,-165.3) 3(-68.9,-165.3) 4(-49.2,-165.3) 5(-29.5,-165.3) 6(-9.8,-165.3) 7(9.9,-165.3) 8(29.6,-165.3) 9(49.3,-165.3) 10(68.9,-165.3) 11(88.6,-165.3) 12(108.3,-165.3) 25(108.3,165.3) 26(88.6,165.3) 27(68.9,165.3) 28(49.3,165.3) 29(29.6,165.3) 30(9.9,165.3) 31(-9.8,165.3) 32(-29.5,165.3) 33(-49.2,165.3) 34(-68.9,165.3) 35(-88.5,165.3) 36(-108.2,165.3)
  oval 63x11 smd paste-3937 mask+2: 13(165.4,-108.3) 14(165.4,-88.6) 15(165.4,-68.9) 16(165.4,-49.2) 17(165.4,-29.5) 18(165.4,-9.8) 19(165.4,9.8) 20(165.4,29.5) 21(165.4,49.2) 22(165.4,68.9) 23(165.4,88.6) 24(165.4,108.3) 37(-165.3,108.3) 38(-165.3,88.6) 39(-165.3,68.9) 40(-165.3,49.2) 41(-165.3,29.5) 42(-165.3,9.8) 43(-165.3,-9.8) 44(-165.3,-29.5) 45(-165.3,-49.2) 46(-165.3,-68.9) 47(-165.3,-88.6) 48(-165.3,-108.3)
  rect 177.17x177.17 smd paste-3937 mask+2: 49(0,0)
  silkscreen extent -141,-213 141,141
VH3.96-LI-2P [mm] "接插件，25V/5A  淘宝ID:黄晶宝石   店铺网址:https://shop463601444.taobao.com"
  rect 2.7x2.7 hole 1.5: 1(-1.98,0)
  round 2.7 hole 1.5: 2(1.982,0)
  silkscreen extent -4.06,-4.57 4.07,3.56, body extent -3.98,-4.4 4.03,4.16, height 10.5
XH2.54-LI-2P [mm] "接插件，2P  淘宝ID:黄晶宝石   店铺网址:https://shop463601444.taobao.com"
  rect 1.7x1.7 hole 0.9: 1(-1.27,0)
  round 1.7 hole 0.9: 2(1.27,0)
  silkscreen extent -3.81,-3.51 3.74,2.37, body extent -3.77,-3.3 3.77,2.4, height 7.05

## Part data
C1 C2 C3 C4 C5 C6 C7 C8 C9 C10 C11 C12 C13 C14 C15 C16 C17 C18 C19 C20 C21 C22 C23 C24 C25 C26 C27 C28 C29 C30 C31 C32 C33 C34 C35 C36 C37 C38 C39 C40 C41 C42 C43 C44 C45 C46 C47 C55 C56 C57 C58 C59 C60 C61 C62 C63 C64 C65 C66: library part C, "贴片电容"
CE1 CE2 CE3 CE4: library part CE, "直插电解电容"
D3 D6: library part SS34, "肖特基二极管"
D13: library part TVS, "TVS保护"
E1 E2: library part CE_SMD, "贴片电解电容"
E3 E4: library part CT, "贴片钽电容"
J1 JP1: library part "Header 2", "2P接插件"
J2 JP2 JP3 JP4: library part "Header 4", "4P接插件"
L1 L2: library part L-CDRH, "功率屏蔽电感"
LED1: library part LED-SMD, "贴片LED"
MISO1 MOSI1 SCK1: "测试点"
PAD1 PAD2 PAD3 PAD4: "固定用途的焊盘"
Q1 Q2 Q3 Q4 Q5 Q6 Q7 Q8 Q9 Q10 Q11 Q12 Q13 Q14 Q15 Q16: library part 2SK3615, "N沟场效应管"
R1 R2 R3 R4 R5 R6 R7 R8 R9 R10 R13 R14 R15 R16 R17 R18 R19 R20 R21 R22 R23 R24 R25 R26 R27 R28 R29 R30 R31 R32 R33 R34 R37 R38 R39 R40 R41 R42 R43 R44 R45 R46 R47 R48 R49 R50 R51 R52 R53 R54 R55 R57 R58 R59 R60 R61 R62 R63: library part R, "贴片电阻"
S1: "微动开关"
U1: library part XL1509-5.0E1, "功能类型:降压型;工作电压:4.5V~40V;输出电压:5V;输出电流:2A;输出类型:固定;"
U2: "功能类型:降压型;工作电压:4.5V~40V;输出电压:5V;输出电流:2A;输出类型:固定;"
U3: library part stm32h750vbt6_1, "CPU内核:ARM Cortex-M7;CPU最大主频:480MHz;CPU位数:32 Bit;"
U5: "类型:CAN收发器;数据速率:1Mbps;"
V1 V2 V3: library part AMS1117, "三端稳压芯片"
X1: library part XTAL-2P, "2脚无源脚晶振"

## Via types
v1: diameter 0.6, hole 0.3, Component Side to Bottom Layer, 596 vias
v2: diameter 0.8, hole 0.4, Component Side to Bottom Layer, 60 vias
v3: diameter 0.762, hole 0.381, Component Side to Bottom Layer, 50 vias
v4: diameter 0.5, hole 0.5, Component Side to Bottom Layer, tented both sides, 32 vias

## Nets (pads, with @x,y where several pads share a name; then routed paths per layer and width w, separated by ;. In a path a pad name is that pad's centre, name@x,y a point inside that pad or via, vN(x,y) a via of type N, cw(c..) or ccw(c..) an arc to the next point about the centre after c; other vN are vias at no path point)
3.3V: C10.2 C11.2 C33.2 C55.2 C56.2 C57.2 C58.2 C59.2 C60.2 C61.2 C62.2 C66.2 JP4.1 R44.2 R49.2 R50.2 R52.2 R61.2 R62.2 U3.6 U3.11 U3.20 U3.21 U3.27 U3.50 U3.75 U3.100 U5.3 U8.4 U8.16 V1.2 V1.4 | length 81
  Component Side w0.279: U3.21@32.678,33.903 33.649,33.903 v1@34.149,34.403 ; U3.20@32.678,34.403 v1@34.149,34.403 ; U3.11@32.678,38.903 v1(34.29,38.903) ; U3.6@32.678,41.403 v1(34.387,41.402) v1(34.387,41.402) ; v1(34.163,34.417) v1@34.149,34.403 ; v1(34.163,43.561) 34.228,43.626 U3.100@34.228,45.453 ; U3.27@34.728,30.353 34.739,30.364 34.739,31.507 v1(35.179,31.947) ; v1(45.847,32.243) 46.228,31.862 U3.50@46.228,30.353 ; v1(46.228,43.815) 46.316,43.903 U3.75@47.778,43.903
  Component Side w0.3: v1(82.296,50.038) 82.565,50.307 R61.2@82.565,50.8 ; R50.2@87.615,50.8 87.615,50.307 v1(87.884,50.038)
  Component Side w0.4: R49.2@28.844,26.67 29.083,26.909 R44.2@29.083,29.83 29.195,29.718 v1@30.099,29.718 ; R62.2@81.31,36.195 v1(81.96,36.195) ; v1(85.09,44.831) U8.4@85.09,46.247 ; v1(86.726,35.313) R52.2@86.726,36.195 ; U8.16@88.9,40.776 U8.16@88.957,40.833
  Component Side w0.5: U8.16@88.957,40.833 88.988,40.864 89.018,40.833 C66.2@91.059,40.833 ; v1(92.583,40.132) 92.227,40.132 ; C66.2@91.059,40.833 C66.2@91.526,40.833 ; C66.2@91.059,40.833 91.247,41.021 92.842,41.021 v1(93.03,40.833) ; C66.2@91.059,40.833 91.994,39.898 ; C66.2@91.526,40.833 v1(92.329,40.833) v1(93.03,40.833) ; C66.2@91.526,40.833 91.973,40.386 ; 91.973,40.386 93.03,40.386 ; 91.973,40.386 92.161,40.198 ; 91.994,39.898 92.73,39.898 v1@92.837,40.005 ; 91.994,39.898 92.227,40.132 ; 92.161,40.198 93.03,40.198 ; 92.161,40.198 92.227,40.132 ; 92.227,40.132 92.354,40.005 v1@92.837,40.005 ; v1@92.837,40.005 93.03,40.198 ; 93.03,40.198 93.03,40.386 ; 93.03,40.386 v1(93.03,40.833)
  Bottom Layer w0.279: v1(34.163,34.417) 34.837,34.417 C59.2@34.91,34.49 ; v1(34.387,41.402) 34.91,41.402 35.037,41.275 ; C60.2@34.881,32.937 C60.2@34.91,32.966
  Bottom Layer w0.3: V1.4@22.591,30.367 23.749,31.525 23.749,31.623 24.384,30.988 24.765,30.988
  Bottom Layer w0.4: v1@30.988,30.565 v1(31.75,29.803) ; v1(50.673,32.385) 50.688,32.4 C33.2@51.689,32.4 54.049,32.4 U5.3@54.064,32.385
  Bottom Layer w0.5: v1(34.163,43.561) 34.544,43.18 C61.2@35.037,43.18 C57.2@35.037,41.783 35.037,41.275 C58.2@35.037,39.243 C58.2@35.037,38.983 ; v1(34.29,38.903) 34.957,38.903 C58.2@35.037,38.983 ; C60.2@35.037,32.966 C59.2@35.037,34.49 C56.2@35.037,36.014 C58.2@35.037,38.983 ; C60.2@35.179,32.639 v1(35.179,31.947) v1(38.1,31.947) v1(41.021,31.947) 45.805,31.947 45.847,31.989 v1(45.847,32.243) 45.847,32.878 C62.2@45.862,32.893 ; C62.2@45.735,32.893 v1(45.735,37.719) C55.2@45.735,43.307 45.735,43.322 v1(46.228,43.815)
  other v1: 30.099,28.194 30.924,28.194 31.75,28.194 30.099,28.998 30.924,28.998 31.75,28.998 30.099,29.803 30.924,29.803 30.099,30.607 30.924,30.607 35.052,37.973 45.72,40.005
24V: C5.2 C6.2 CE2.2 R4.1 U1.1
+5V: C7.2 C8.2 C23.1 C24.1 E2.1 L2.2 U2.3 V1.3
  other v1: 18.161,38.354 15.621,38.608 16.891,39.243 18.161,39.243 15.494,39.37 14.986,40.132 15.748,40.132 18.161,40.132 16.891,40.259
+12V: C9.1 C12.1 C21.2 C22.2 CE3.2 E1.1 L1.2 R10.2 R34.2 U1.3 U2.1 | length 2.1
  Component Side w0.279: L1.2@6.822,79.121 7.584,79.883 8.636,79.883
  other v1: 25.4,63.373 2.836,63.754 4.022,63.754 5.207,63.754 6.392,63.754 68.834,63.881 24.892,64.135 25.781,64.135 2.836,64.643 4.022,64.643 5.207,64.643 6.392,64.643 68.834,64.834 69.85,64.897 24.892,65.024 25.781,65.024 26.67,65.024 27.559,65.024 2.836,65.532 4.022,65.532 5.207,65.532 6.392,65.532 68.834,65.786 69.85,65.786 70.993,65.786
+U2_24V: C2.2 C3.2 C4.2 C31.2 C35.2 C36.2 C37.2 C46.2 CE1.1 CE4.1 D13.2 E3.1 E4.1 JP1.2 Q1.2 Q2.2 Q5.2 Q6.2 Q9.2 Q10.2 Q13.2 Q14.2 R4.2 U4.33 U7.33 | length 34.5
  Component Side w0.259: U7.33@42.68,62.21 45.867,62.21 46.543,61.534 C46.2@47.244,61.534 C46.2@47.498,61.534
  Component Side w0.279: U4.33@85.105,62.327 88.295,62.327 89.342,61.28 C31.2@90.043,61.28
  Component Side w0.5: C46.2@47.498,61.534 C35.2@49.276,61.534 ; C35.2@49.464,61.722 C35.2@49.276,61.534 ; C35.2@49.469,61.341 C35.2@49.276,61.534 ; C31.2@90.043,61.28 C4.2@92.075,61.28
  Component Side w1: C35.2@49.276,61.534 51.115,61.534 52.578,60.071 52.881,60.071 E3.1@53.086,60.276 ; C4.2@92.075,61.28 94.246,61.28 E4.1@94.996,60.53
  Component Side w2.8: 59.944,94.361 59.944,94.615 61.849,96.52 62.738,96.52 ; JP1.2@62.053,105.791 62.484,105.36 62.484,99.223 62.194,98.933 62.194,97.962
  other v1: 53.086,58.928 54.483,58.928 55.499,58.928 56.515,58.928 57.658,58.928 94.996,59.387 96.393,59.387 97.282,59.436 98.171,59.485 99.111,59.534 54.483,59.69 55.499,59.69 56.515,59.69 57.658,59.69 96.393,60.149 97.282,60.198 98.171,60.247 99.111,60.296 54.483,60.452 55.499,60.452 56.515,60.452 57.658,60.452 96.393,60.911 97.282,60.96 98.171,61.009 99.111,61.058 56.515,61.214 57.658,61.214 98.171,61.771 99.111,61.82
  other v2: 57.785,90.17 36.322,90.805 37.338,90.805 38.354,90.805 47.244,90.805 60.198,90.805 61.151,90.805 62.103,90.805 71.628,90.805 81.28,90.805 82.169,90.805 83.058,90.805 15.875,91.059 16.891,91.059 102.235,91.059 57.785,91.44 34.29,91.567 93.472,91.567 15.875,92.202 16.891,92.202 26.162,92.329 72.263,92.329 32.893,92.71 55.88,93.091 58.166,93.091 60.452,93.091 62.357,93.091 102.235,93.091 45.339,93.218 100.33,93.218 93.472,93.472 17.526,93.599 16.129,93.853 26.162,93.98 87.249,94.361 54.769,94.742 56.896,94.742 59.023,94.742 61.151,94.742 63.278,94.742 43.688,94.869 17.526,94.911 100.33,94.996 102.235,94.996 16.129,95.377 93.472,95.377 26.162,95.504 64.516,96.139 17.526,96.224 26.162,97.028 100.33,97.155 102.235,97.155 93.472,97.282 17.526,97.536 66.04,97.536 67.31,98.806
BOOT0: R51.2 U3.94 | length 2.6
  Component Side w0.279: U3.94@37.228,45.453 37.228,44.336 v1(37.846,43.718)
  Bottom Layer w0.5: R51.2@37.846,43.068 v1(37.846,43.718)
CAN1_RX: U3.51 U5.4 | length 8.4
  Component Side w0.279: U3.51@47.778,31.903 48.869,31.903 v1(49.403,31.369)
  Bottom Layer w0.279: v1(49.403,31.369) 49.403,33.02 50.038,33.655 U5.4@54.064,33.655
CAN1_TX: U3.52 U5.1 | length 8.1
  Component Side w0.279: U3.52@47.778,32.403 49.512,32.403 50.292,31.623 50.292,30.353 50.8,29.845 v1(52.451,29.845)
  Bottom Layer w0.279: v1(52.451,29.845) U5.1@54.064,29.845
CAN_H: J1.2 R25.2 U5.7 | length 13.8
  Bottom Layer w0.4: J1.2@55.499,26.289 55.499,27.559 56.134,28.194 60.96,28.194 61.453,27.701 R25.2@62.103,27.701 ; U5.7@59.474,31.115 61.595,31.115 62.103,30.607 R25.2@62.103,27.94
CAN_L: J1.1 R25.1 U5.6 | length 14
  Bottom Layer w0.4: J1.1@58.039,26.289 62.738,26.289 63.246,26.797 63.246,30.988 61.849,32.385 U5.6@59.474,32.385